# Altium PCB MainBoard.PcbDoc
Units mm, origin at the board's own origin, x right, y up, seen from the top; angles counter-clockwise.
Board outline 99.97 x 100 mm, 2 copper layers (Top Layer, Bottom Layer); 57 components, 54 nets, 235 pads, 18 vias.
Unrouted connection lines stored in the file: 44.
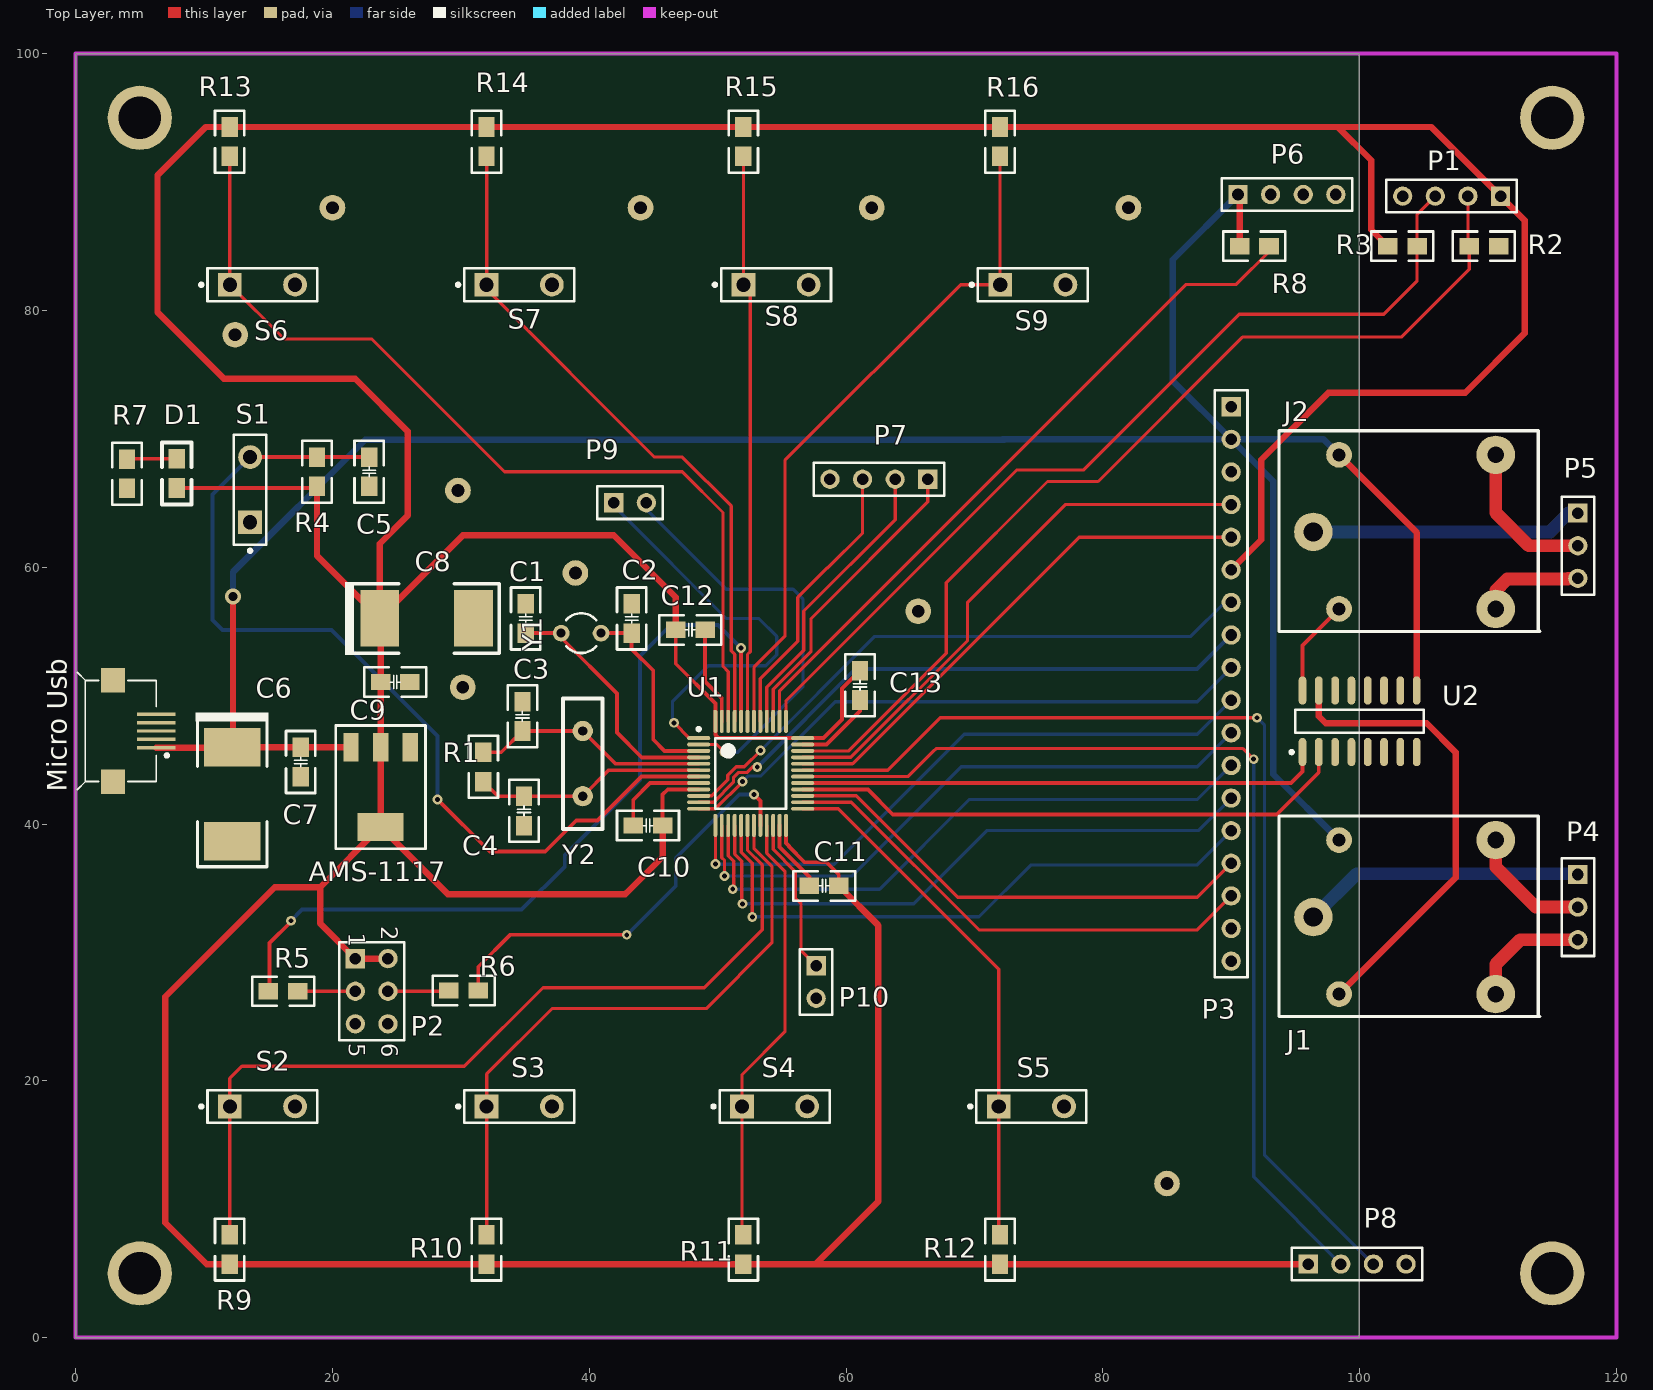
[diagram p0: Top Layer view]
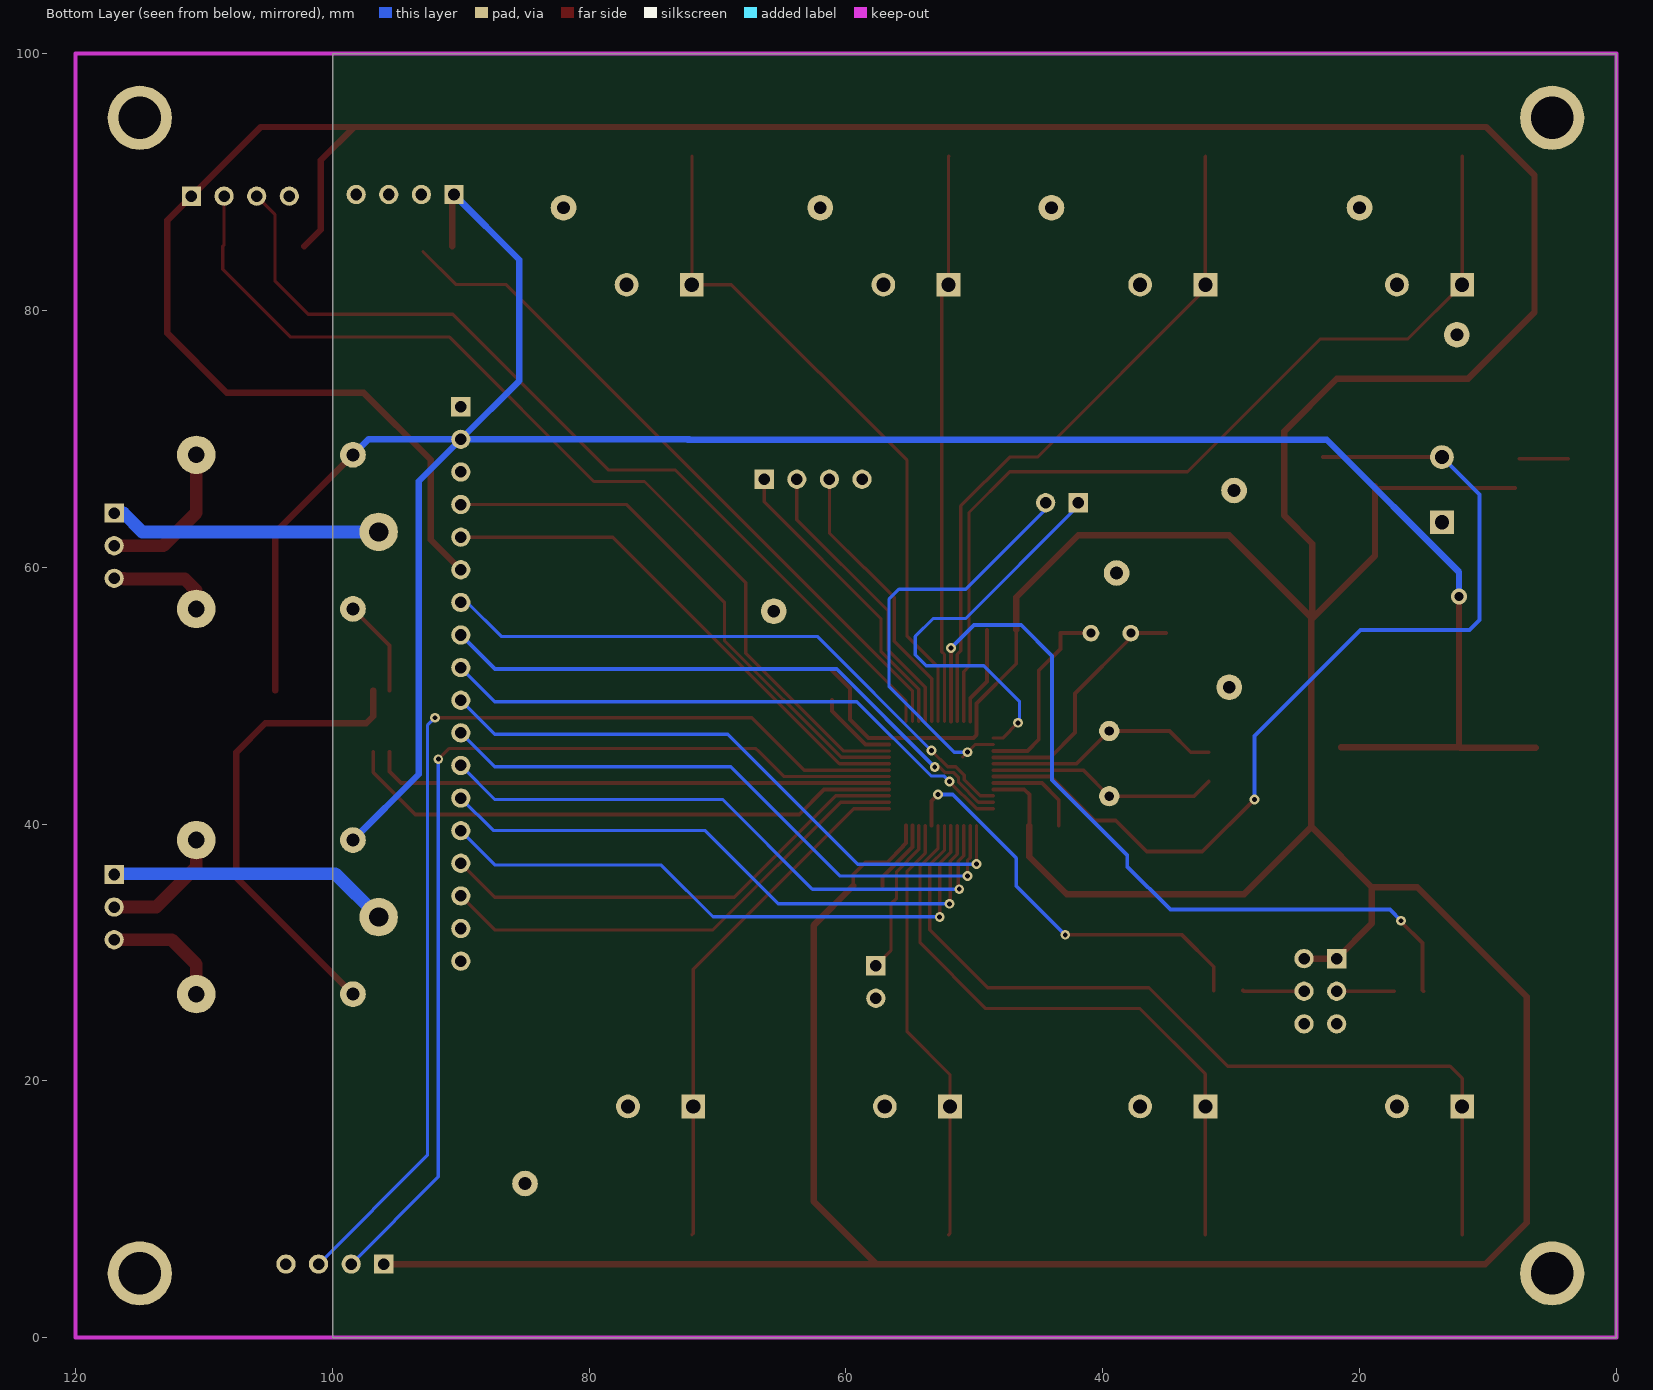
[diagram p1: Bottom Layer view, seen from below]

## Layer stack, top to bottom
Top Layer: signal copper 0.0356
Dielectric: core 0.32, FR-4, Dk 4.8
Bottom Layer: signal copper 0.0356

## Board outline
0,0 0,100 99.95,100 99.975,99.975 99.975,0 0,0

## Design rules (kind name [scope] priority, off if disabled: settings)
Clearance VCC [InNet('VCC3V3') vs Inpolygon] p1: gap=1
Clearance Polygon [inpolygon] p2: gap=0.508
Clearance [All] p3: gap=0.2
PolygonConnect [All] p1: connectstyle=Relief reliefconductorwidth=0.254 reliefentries=4 polygonreliefangle="90 Angle" airgapwidth=0.254
RoutingCorners RoutingCorners_1 [All] p1: cornerstyle=45-Degree minsetback=2.54 maxsetback=2.54
RoutingCorners [All] p2: cornerstyle=45-Degree minsetback=2.54 maxsetback=2.54
RoutingVias [All] p1: holewidth=0.381 width=0.762 viastyle="Through Hole" minholewidth=0.381 minwidth=0.762 maxholewidth=0.711 maxwidth=1.27
SolderMaskExpansion [All] p1: expansion=0.102
Width [All] p1: maxlimit=3 minlimit=0.254 preferedwidth=0.254
27 further rules are at their usual default settings.

## Components (designator, comment, footprint, x,y, rotation, side; value= is the part's Value field where it differs from the comment)
AMS-1117 "AMS-1117" SOT223 26.049,45.974 r180 top
C1 "Cap Semi" 0805C 35.052,57.15 r270 top
C2 "Cap Semi" 0805C 43.307,57.15 r270 top
C3 "Cap Semi" 0805C 34.798,49.53 r270 top
C4 "Cap Semi" 0805C 34.925,39.878 r90 top
C5 "Cap Semi" 0805C 22.86,66.294 r90 top
C6 "Cap Pol3" 7343C 12.192,45.974 r90 top
C7 "Cap Semi" 0805C 17.526,43.688 r90 top
C8 "6.3V,330uF" 7343C 23.688,56.007 r180 top
C9 "Cap Semi" 0805C 26.035,51.054 r180 top
C10 "Cap Semi" 0805C 43.434,39.878 r0 top
C11 "Cap Semi" 0805C 57.15,35.179 r0 top
C12 "Cap Semi" 0805C 49.022,55.118 r180 top
C13 "Cap Semi" 0805C 61.087,49.657 r90 top
D1 "LED1" 0805 7.875,66.167 r90 top
J1 "RWLAY-SPDT" RELAY 95,25 r0 top
J2 "RWLAY-SPDT" RELAY 95,55 r0 top
"Micro Usb" "Micro Usb" MICRO_USB 0.762,47.244 r180 top
P1 "Header 4" HDR1X4 110.978,88.902 r180 top
P2 "Header 3X2" HDR2X3 21.785,29.515 r270 top
P3 "Header 18" HDR1X18 90,72.5 r270 top
P4 "Header 3" HDR1X3 117,36.068 r270 top
P5 "Header 3" HDR1X3 117,64.215 r270 top
P6 "Header 4-DHT11" HDR1X4 90.531,89.029 r0 top
P7 "Header 4 NO USED" HDR1X4 66.37,66.85 r180 top
P8 "Header 4 COMM" HDR1X4 96,5.725 r0 top
P9 "Header 2" HDR1X2 41.91,65.024 r0 top
P10 "Header 2" HDR1X2 57.675,28.965 r270 top
R1 "1M" 0805R 31.75,45.593 r270 top
R2 "Res Semi" 0805R 110.825,85 r180 top
R3 "Res Semi" 0805R 102.189,85 r0 top
R4 "Res Semi" 0805R 18.796,68.58 r270 top
R5 "Res Semi" 0805R 17.3,26.975 r180 top
R6 "Res Semi" 0805R 31.361,27.025 r180 top
R7 "Res Semi" 0805R 4,66.139 r90 top
R8 "Res Semi" 0805R 92.944,85 r180 top
R9 "Res Semi" 0805R 12,8 r270 top
R10 "Res Semi" 0805R 32,8 r270 top
R11 "Res Semi" 0805R 52,8 r270 top
R12 "Res Semi" 0805R 72,8 r270 top
R13 "Res Semi" 0805R 12,92 r90 top
R14 "Res Semi" 0805R 32,92 r90 top
R15 "Res Semi" 0805R 52,92 r90 top
R16 "Res Semi" 0805R 72,92 r90 top
S1 "SW-PB" SPST-2 13.589,66.04 r90 top
S2 "SW-PB" SPST-2 14.55,18 r0 top
S3 "SW-PB" SPST-2 34.55,18 r0 top
S4 "SW-PB" SPST-2 54.44,18 r0 top
S5 "SW-PB" SPST-2 74.44,18 r0 top
S6 "SW-PB" SPST-2 14.55,82 r0 top
S7 "SW-PB" SPST-2 34.55,82 r0 top
S8 "SW-PB" SPST-2 54.55,82 r0 top
S9 "SW-PB" SPST-2 74.55,82 r0 top
U1 "STM32F103C8T6" LQFP48_N 52.578,43.942 r0 top
U2 "ULN2003D" SO16_N 100,48 r90 top
Y1 "32768" R38 39.37,54.864 r90 top
Y2 "8M" XTAL1 39.497,47.244 r270 top

## Footprints (in the part's own frame and the unit in brackets; to place one, negate y for a bottom-side part, rotate by r counter-clockwise, add the part's x,y. Pads: shape width x height; smd on the part's side, far side on the other; paste and mask are expansions set on the pad)
0805 [mil]
  rect 60x50 smd: 1(0,0) 2(90,0)
  silkscreen extent -50,-45 140,45
0805C [mil]
  rect 60x50 smd: 1(0,0) 2(90,0)
  silkscreen extent -50,-45 140,45
0805R [mil]
  rect 60x50 smd: 1(0,0) 2(90,0)
  silkscreen extent -50,-45 140,45
7343C [mm]
  rect 3x4.4 smd: 1(0,0) 2(-7.3,0)
  silkscreen extent -9.31,-2.84 2.7,2.84
HDR1X2 [mm] "Connector; Header; 2 Position"
  rect 1.5x1.5 hole 0.9: 1(0,0)
  round 1.5 hole 0.9: 2(2.54,0)
  silkscreen extent -1.27,-1.27 3.81,1.27
HDR1X3 [mm] "Connector; Header; 3 Position"
  rect 1.5x1.5 hole 0.9: 1(0,0)
  round 1.5 hole 0.9: 2(2.54,0) 3(5.08,0)
  silkscreen extent -1.27,-1.27 6.35,1.27
HDR1X4 [mm] "Connector; Header; 4 Position"
  rect 1.5x1.5 hole 0.9: 1(0,0)
  round 1.5 hole 0.9: 2(2.54,0) 3(5.08,0) 4(7.62,0)
  silkscreen extent -1.27,-1.27 8.89,1.27
HDR1X18 [mm] "Connector; Header; 18 Position"
  rect 1.5x1.5 hole 0.9: 1(0,0)
  round 1.5 hole 0.9: 2(2.54,0) 3(5.08,0) 4(7.62,0) 5(10.16,0) 6(12.7,0) 7(15.24,0) 8(17.78,0) 9(20.32,0) 10(22.86,0) 11(25.4,0) 12(27.94,0) 13(30.48,0) 14(33.02,0) 15(35.56,0) 16(38.1,0) 17(40.64,0) 18(43.18,0)
  silkscreen extent -1.27,-1.27 44.45,1.27
HDR2X3 [mm] "Connector; Header; 3x2 Position"
  rect 1.5x1.5 hole 0.9: 1(0,0)
  round 1.5 hole 0.9: 2(0,2.54) 3(2.54,0) 4(2.54,2.54) 5(5.08,0) 6(5.08,2.54)
  silkscreen extent -1.27,-1.27 6.35,3.81
LQFP48_N [mm] "Thin QFP, 48-Leads, Body 7x7mm, Pitch 0.5mm, IPC Medium Density"
  oval 1.8x0.3 smd: 1(-4.05,2.75) 2(-4.05,2.25) 3(-4.05,1.75) 4(-4.05,1.25) 5(-4.05,0.75) 6(-4.05,0.25) 7(-4.05,-0.25) 8(-4.05,-0.75) 9(-4.05,-1.25) 10(-4.05,-1.75) 11(-4.05,-2.25) 12(-4.05,-2.75) 25(4.05,-2.75) 26(4.05,-2.25) 27(4.05,-1.75) 28(4.05,-1.25) 29(4.05,-0.75) 30(4.05,-0.25) 31(4.05,0.25) 32(4.05,0.75) 33(4.05,1.25) 34(4.05,1.75) 35(4.05,2.25) 36(4.05,2.75)
  oval 0.3x1.8 smd: 13(-2.75,-4.05) 14(-2.25,-4.05) 15(-1.75,-4.05) 16(-1.25,-4.05) 17(-0.75,-4.05) 18(-0.25,-4.05) 19(0.25,-4.05) 20(0.75,-4.05) 21(1.25,-4.05) 22(1.75,-4.05) 23(2.25,-4.05) 24(2.75,-4.05) 37(2.75,4.05) 38(2.25,4.05) 39(1.75,4.05) 40(1.25,4.05) 41(0.75,4.05) 42(0.25,4.05) 43(-0.25,4.05) 44(-0.75,4.05) 45(-1.25,4.05) 46(-1.75,4.05) 47(-2.25,4.05) 48(-2.75,4.05)
  silkscreen extent -4.17,-2.75 2.75,3.57, body extent -3.5,-3.5 3.5,3.5, height 1.6
MICRO_USB [mm]
  rect 3x0.25 smd: 1(-5.508,1.3) 2(-5.508,0.65) 3(-5.508,0) 4(-5.508,-0.65) 5(-5.508,-1.3)
  rect 1.9x1.9 smd: ""(-2.15,3.95) ""(-2.15,-3.95)
  silkscreen extent -6.47,-4.57 0.63,4.57
R38 [mm] "Crystal, Thru-Hole; 2 Leads; Body 3.1 x 8.2 mm (Dia.xH)"
  round 1.3 hole 0.7: 1(0,1.55) 2(0,-1.55)
  silkscreen extent -1.55,-1.19 1.55,1.17
RELAY [mm]
  round 3 hole 1.5: 1(1.4,7.75)
  round 3 hole 1.3: 2(15.6,13.75) 3(15.6,1.75)
  round 2 hole 1: 4(3.4,13.75) 5(3.4,1.75)
  silkscreen extent -1.27,0 19.05,15.62
SO16_N [mm] "SOIC, 16-Leads, Body 9.9x3.9mm, Pitch 1.27mm, IPC Medium Density"
  oval 2.2x0.6 smd: 1(-2.4,4.445) 2(-2.4,3.175) 3(-2.4,1.905) 4(-2.4,0.635) 5(-2.4,-0.635) 6(-2.4,-1.905) 7(-2.4,-3.175) 8(-2.4,-4.445) 9(2.4,-4.445) 10(2.4,-3.175) 11(2.4,-1.905) 12(2.4,-0.635) 13(2.4,0.635) 14(2.4,1.905) 15(2.4,3.175) 16(2.4,4.445)
  silkscreen extent -2.52,-5 0.9,5.42, body extent -1.95,-4.95 1.95,4.95, height 1.75
SOT223 [mm]
  rect 1.2x2.2 smd: 1(0,0) 2(2.3,0) 3(4.6,0)
  rect 3.6x2.2 smd: 4(2.3,6.2)
  silkscreen extent -1.2,-1.7 5.8,7.9
SPST-2 [mm] "Switch; 2 Leads"
  rect 1.85x1.85 hole 1.1: 1(-2.54,0)
  round 1.85 hole 1.1: 2(2.54,0)
  silkscreen extent -4.89,-1.27 4.28,1.27
XTAL1 [mil]
  round 62 hole 28: 1(0,0) 2(200,0)
  silkscreen extent -100,-60 300,60

## Part data
C1 C2 C3 C4 C5 C7 C9 C10 C11 C12 C13: "Capacitor (Semiconductor SIM Model)"
C6: "Polarized Capacitor (Surface Mount)"
C8: library part "Cap Pol3", "Polarized Capacitor (Surface Mount)"
D1: "Typical RED GaAs LED"
P1: "Header, 4-Pin"
P2: "Header, 3-Pin, Dual row"
P3: "Header, 18-Pin"
P4 P5: "Header, 3-Pin"
P6 P7 P8: library part "Header 4", "Header, 4-Pin"
P9 P10: "Header, 2-Pin"
R1: library part "Res Semi", "Semiconductor Resistor"
R2 R3 R4 R5 R6 R7 R8 R9 R10 R11 R12 R13 R14 R15 R16: "Semiconductor Resistor"
S1 S2 S3 S4 S5 S6 S7 S8 S9: "Switch"
U1: "STM32 ARM-based 32-bit MCU Performance Line with 64 kB Flash, 20 kB Internal RAM, -40 to +85癈 Temperature, 48-Pin LQFP, Tray"
U2: "Seven Darlington Array"
Y1 Y2: library part XTAL, "Crystal Oscillator"

## Free pads (board coordinates)
  round 5 hole 3.3: 0(5,95) 1(5,5) 2(115,5) 3(115,95)
  round 2 hole 1: 7(85,12) 8(20,88) 9(44,88) 10(62,88) 11(82,88) 12(65.625,56.575) 13(65.625,56.575) 14(29.775,65.975) 15(29.775,65.975) 16(30.15,50.65) 17(30.15,50.65) 18(38.925,59.55) 19(38.925,59.55) 20(12.425,78.1)

## Via types
v1: diameter 0.762, hole 0.381, Top Layer to Bottom Layer, 17 vias
v2: diameter 1.27, hole 0.711, Top Layer to Bottom Layer, 1 vias

## Nets (pads, with @x,y where several pads share a name; then routed paths per layer and width w, separated by ;. In a path a pad name is that pad's centre, name@x,y a point inside that pad or via, vN(x,y) a via of type N, cw(c..) or ccw(c..) an arc to the next point about the centre after c; other vN are vias at no path point)
+5: "Micro Usb.1" AMS-1117.3 C6.1 C7.2 J1.4 J2.4 P3.2 P6.1 R8.2 U2.9 | length 202.6
  Top Layer w0.5: 6.27,45.944 12.162,45.944 C6.1 ; v2(12.255,57.721) 12.255,46.038 C6.1 ; AMS-1117.3 C7.2 C6.1 ; P6.1 90.658,88.902 R8.2 ; J2.4 104.445,62.705 U2.9
  Bottom Layer w0.5: v2(12.255,57.721) 12.255,59.627 22.554,69.925 72.325,69.925 ; 72.22,69.96 P3.2 ; P6.1 85.45,83.948 85.45,74.51 P3.2 ; J1.4 93.275,43.875 93.275,66.685 P3.2 ; J2.4 97.19,69.96 P3.2
BAT: P9.1 U1.1 | length 31.7
  Top Layer w0.254: v1(46.609,47.879) 47.796,46.692 U1.1
  Bottom Layer w0.254: P9.1@42.291,64.516 42.291,64.389 50.673,56.007 53.213,56.007 54.61,54.61 54.61,53.174 53.76,52.324 49.276,52.324 46.482,49.53 46.482,48.006 v1(46.609,47.879)
BOOT0: R5.2 U1.44 | length 63.5
  Top Layer w0.3: R5.2 15.1,27.061 15.1,30.721 16.764,32.385 v1(16.764,32.464) ; U1.44 v1(51.828,53.709)
  Bottom Layer w0.3: v1(16.764,32.464) 17.637,33.337 34.734,33.337 38.1,36.703 38.1,37.592 43.942,43.434 43.942,53.086 46.355,55.499 50.038,55.499 v1(51.828,53.709)
BOOT1: R6.1 U1.20 | length 32.8
  Top Layer w0.3: R6.1 31.361,28.886 33.844,31.369 v1(42.926,31.369) ; v1(52.832,42.291) 53.328,41.795 U1.20
  Bottom Layer w0.3: v1(42.926,31.369) 46.736,35.179 46.736,37.338 51.689,42.291 v1(52.832,42.291)
GND: "Micro Usb.4" "Micro Usb.5" AMS-1117.1 C1.1 C2.1 C3.1 C4.1 C5.1 C6.2 C7.1 C8.2 C9.1 C10.1 C11.1 C12.1 C13.1 P1.4 P2.5 P2.6 P3.1 P6.4 P8.4 pad.7 pad.8 pad.9 pad.10 pad.11 pad.12 pad.13 pad.14 pad.15 pad.16 pad.17 pad.18 pad.19 pad.20 R2.1 R7.1 S1.1 S2.2 S3.2 S4.2 S5.2 S6.2 S7.2 S8.2 S9.2 U1.8 U1.23 U1.35 U1.47 U2.8 | length 27.4
  Top Layer w0.3: C10.1 43.434,41.879 44.747,43.192 U1.8 ; C12.1 49.022,51.085 50.328,49.779 U1.47 ; U1.23 54.828,38.197 57.15,35.875 C11.1 ; U1.35 58.48,46.192 61.087,48.799 C13.1
NetD1_2: D1.2 R7.2 | length 3.8
  Top Layer w0.3: R7.2@3.75,68.45 D1.2@7.56,68.45
NetJ1_1: J1.1 P4.1 | length 22
  Bottom Layer w1: J1.1 99.775,36.125 116.943,36.125 P4.1
NetJ1_2: J1.2 P4.2 | length 9.8
  Top Layer w1: J1.2 110.6,36.65 113.722,33.528 P4.2
NetJ1_3: J1.3 P4.3 | length 9.5
  Top Layer w1: J1.3 110.6,29.075 112.513,30.988 P4.3
NetJ2_1: J2.1 P5.1 | length 20.5
  Bottom Layer w1: J2.1 114.81,62.75 P5.1@116.275,64.215
NetJ2_2: J2.2 P5.2 | length 9.8
  Top Layer w1: J2.2@110.6,67.35 110.6,64.25 113.175,61.675 P5.2@116.275,61.675
NetJ2_3: J2.3 P5.3 | length 7.5
  Top Layer w1: J2.3 110.6,58.175 111.5,59.075 116.215,59.075 P5.3@116.275,59.135
NetP2_3: P2.3 R5.1 | length 4.5
  Top Layer w0.3: R5.1 P2.3
NetP2_4: P2.4 R6.2 | length 4.8
  Top Layer w0.3: P2.4 29.025,26.975 R6.2
NetP7_1: P7.1 U1.39 | length 23.8
  Top Layer w0.254: U1.39 54.328,50.511 57.277,53.46 57.277,56.007 66.37,65.1 P7.1
NetP7_2: P7.2 U1.40 | length 23
  Top Layer w0.254: U1.40 53.828,50.653 56.715,53.54 56.715,56.588 63.83,63.703 P7.2
NetP7_3: P7.3 U1.41 | length 22.2
  Top Layer w0.254: U1.41 53.328,51.308 56.249,54.229 56.249,57.646 58.547,59.944 58.569,59.944 61.29,62.665 P7.3
NetP9_2: P9.2 U1.2 | length 33.5
  Top Layer w0.254: U1.2 49.947,46.192 50.927,45.212
  Bottom Layer w0.254: P9.2@44.069,64.897 50.673,58.293 50.927,58.293 55.88,58.293 56.642,57.531 56.642,50.673 51.562,45.593 v1(50.546,45.593)
OSC_IN: C3.2 R1.1 U1.5 Y2.1 | length 18.5
  Top Layer w0.3: R1.1 33.147,45.593 C3.2 Y2.1 42.049,44.692 U1.5
OSC_OUT: C4.2 R1.2 U1.6 Y2.2 | length 18.1
  Top Layer w0.3: R1.2 32.893,42.164 C4.2 Y2.2 41.525,44.192 U1.6
OUT1: J2.5 U2.16 | length 7.5
  Top Layer w0.3: U2.16 95.555,53.905 J2.5
OUT2: J1.5 U2.15 | length 36.4
  Top Layer w0.5: U2.15 96.825,48.4 97.375,47.85 105.225,47.85 107.475,45.6 107.475,35.825 J1.5
PA0: P3.7 U1.10 | length 47.9
  Top Layer w0.254: U1.10 49.544,42.192 50.781,43.429 50.781,43.788 51.462,44.469 52.089,44.469 v1(53.34,45.72)
  Bottom Layer w0.254: v1(53.34,45.72) 62.23,54.61 86.868,54.61 89.518,57.26 P3.7
PA1: P3.8 U1.11 | length 47.1
  Top Layer w0.254: U1.11 49.686,41.692 51.235,43.241 51.235,43.6 51.65,44.015 52.31,44.015 v1@52.745,44.45
  Top Layer w0.3: v1@52.745,44.45 v1(53.086,44.45)
  Bottom Layer w0.3: v1(53.086,44.45) 53.104,44.45 60.724,52.07 87.35,52.07 P3.8
PA2: P3.9 U1.12 | length 46
  Top Layer w0.254: U1.12 49.828,41.192 v1(51.943,43.307)
  Bottom Layer w0.254: v1(51.943,43.307) 52.378,43.742 53.379,43.742 59.167,49.53 87.35,49.53 P3.9
PA3: P3.10 U1.13 | length 48.5
  Top Layer w0.254: v1(49.828,36.874) U1.13
  Bottom Layer w0.254: v1(49.828,36.874) 59.099,36.874 69.215,46.99 87.35,46.99 P3.10
PA4: P3.11 U1.14 | length 48.1
  Top Layer w0.254: U1.14 50.328,37.375 50.536,37.167 50.536,35.951 v1(50.546,35.941)
  Bottom Layer w0.254: v1(50.546,35.941) 60.452,35.941 68.961,44.45 87.35,44.45 P3.11
PA5: P3.12 U1.15 | length 48
  Top Layer w0.254: U1.15 50.828,37.517 51.254,37.091 51.254,34.998 v1(51.181,34.925)
  Bottom Layer w0.254: v1(51.181,34.925) 62.611,34.925 69.596,41.91 87.35,41.91 P3.12
PA6: P3.13 U1.16 | length 47.9
  Top Layer w0.254: U1.16 51.328,37.659 51.889,37.098 51.889,33.728 v1(51.943,33.782)
  Bottom Layer w0.254: v1(51.943,33.782) 65.278,33.782 70.993,39.497 87.477,39.497 P3.13
PA7: P3.14 U1.17 | length 47.6
  Top Layer w0.254: U1.17 51.851,39.869 51.851,37.79 52.705,36.936 v1(52.705,32.766)
  Bottom Layer w0.254: v1(52.705,32.766) 70.358,32.766 74.396,36.804 87.324,36.804 P3.14
PA8: U1.29 U2.1 | length 40.8
  Top Layer w0.3: U1.29 94.667,43.192 95.555,44.08 U2.1
PA9: P8.2 U1.30 | length 78.5
  Top Layer w0.254: U1.30 64.825,43.692 66.825,45.692 66.842,45.692 67.025,45.875 90.925,45.875 v1(91.75,45.05)
  Bottom Layer w0.254: v1(91.75,45.05) 91.75,12.515 P8.2
PA10: P8.3 U1.31 | length 83.4
  Top Layer w0.254: U1.31 63.267,44.192 67.35,48.275 v1(92,48.275)
  Bottom Layer w0.254: v1(92,48.275) 92.6,47.675 92.6,14.205 P8.3
PA11: P3.5 U1.32 | length 40.7
  Top Layer w0.254: U1.32 60.51,44.692 78.158,62.34 P3.5
PA12: P3.4 U1.33 | length 43.3
  Top Layer w0.254: U1.33 60.368,45.192 69.469,54.293 69.469,57.277 77.072,64.88 P3.4
PA15: P6.2 R8.1 U1.38 | length 54.7
  Top Layer w0.254: U1.38 54.828,50.369 86.484,82.025 90.385,82.025 R8.1@92.944,84.584
PB0: R9.1 S2.1 U1.18 | length 67.1
  Top Layer w0.254: R9.1 12.01,8.01 S2.1 12.01,20.185 12.95,21.125 30.275,21.125 36.4,27.25 48.967,27.25 53.467,31.75 53.467,36.816 52.328,37.955 U1.18
PB1: R10.1 S3.1 U1.19 | length 48.7
  Top Layer w0.254: R10.1 32.01,8.01 S3.1 32.01,20.535 37.1,25.625 49.12,25.625 54.229,30.734 54.229,36.696 52.828,38.097 U1.19
PB6: R16.1 S9.1 U1.42 | length 53.8
  Top Layer w0.254: U1.42 52.828,52.193 55.245,54.61 55.245,68.32 68.925,82 S9.1 72,82.01 R16.1
PB7: R15.1 S8.1 U1.43 | length 44.3
  Top Layer w0.254: R15.1 52.01,91.99 S8.1 52.536,81.474 52.536,53.416 52.328,53.208 U1.43
PB8: R14.1 S7.1 U1.45 | length 53.3
  Top Layer w0.254: R14.1 32.01,91.99 S7.1 32.01,81.655 45.085,68.58 47.244,68.58 51.054,64.77 51.054,53.482 51.328,53.208 U1.45
PB9: R13.1 S6.1 U1.46 | length 72.2
  Top Layer w0.254: R13.1 12.01,91.99 S6.1 16.235,77.775 23.063,77.775 33.401,67.437 47.244,67.437 50.419,64.262 50.419,52.271 50.828,51.862 U1.46
PB10: R11.1 S4.1 U1.21 | length 33.9
  Top Layer w0.254: R11.1 51.9,8.1 S4.1 51.9,20.475 55.245,23.82 55.245,36.322 53.828,37.739 U1.21
PB11: P10.1 U1.22 | length 12.3
  Top Layer w0.254: U1.22 54.328,38.022 56.061,36.289 56.061,34.217 56.5,33.778 56.5,30.14 P10.1
PB12: R12.1 S5.1 U1.25 | length 41.2
  Top Layer w0.254: U1.25 59.392,41.192 71.9,28.684 S5.1 71.9,8.1 R12.1
PB13: P3.16 U1.26 | length 38.6
  Top Layer w0.254: U1.26 60.416,41.692 70.358,31.75 87.35,31.75 P3.16
PB14: P3.15 U1.27 | length 37.7
  Top Layer w0.254: U1.27 60.805,42.192 68.707,34.29 87.35,34.29 P3.15
PB15: U1.28 U2.2 | length 43.9
  Top Layer w0.3: U1.28 61.7,42.692 63.642,40.75 93.55,40.75 96.825,44.025 U2.2
PC14: C2.2 U1.3 Y1.2 | length 15.3
  Top Layer w0.3: Y1.2 C2.2 43.307,53.62 44.984,51.943 44.984,46.583 45.875,45.692 U1.3
PC15: C1.2 U1.4 Y1.1 | length 19.5
  Top Layer w0.3: C1.2 Y1.1 37.82,54.509 42.164,50.165 42.164,47.117 44.089,45.192 U1.4
RESET: C5.2 R4.1 S1.2 U1.7 | length 73.8
  Top Layer w0.3: S1.2 R4.1 C5.2 ; v1(28.194,41.91) 32.258,37.846 36.576,37.846 38.989,40.259 40.636,40.259 44.069,43.692 U1.7
  Bottom Layer w0.3: S1.2 10.668,65.659 10.668,55.88 11.43,55.118 19.939,55.118 28.194,46.863 v1(28.194,41.91)
SWCLK: P1.3 R3.2 U1.37 | length 71.5
  Top Layer w0.254: U1.37 55.328,49.613 73.279,67.564 78.486,67.564 90.622,79.7 101.875,79.7 104.475,82.3 R3.2 104.475,87.479 P1.3
SWDIO: P1.2 R2.2 U1.34 | length 76.4
  Top Layer w0.254: U1.34 60.226,45.692 67.818,53.284 67.818,58.801 75.692,66.675 79.629,66.675 90.879,77.925 103.25,77.925 108.539,83.214 R2.2 108.438,85.101 P1.2
VCC3V3: AMS-1117.2 AMS-1117.4 C8.1 C9.2 C10.2 C11.2 C12.2 C13.2 D1.1 P1.1 P2.1 P2.2 P3.6 P8.1 R3.1 R4.2 R9.2 R10.2 R11.2 R12.2 R13.2 R14.2 R15.2 R16.2 U1.9 U1.24 U1.36 U1.48 | length 521.5
  Top Layer w0.3: D1.1 18.669,66.167 R4.2 ; C8.1 C8.1@23.749,55.946 ; 42.799,34.671 42.871,34.599 ; C10.2 45.72,42.291 46.121,42.692 U1.9 ; C12.2 46.736,52.476 49.828,49.384 U1.48 49.828,46.946 50.082,46.692 U1.36 58.249,46.692 59.69,48.133 59.69,50.546 C13.2 ; U1.24 55.328,38.507 55.559,38.276 55.559,38.235 56.769,37.025 58.479,37.025 59.436,36.068 C11.2
  Top Layer w0.5: R4.2 18.796,60.899 C8.1 ; C8.1@23.749,55.946 C9.2 AMS-1117.2 AMS-1117.4 ; P2.2 P2.1 19.05,32.25 19.05,35.075 ; C10.2 45.72,37.447 42.799,34.526 28.997,34.526 AMS-1117.4 ; C12.2 46.736,57.658 41.91,62.484 30.165,62.484 C8.1 ; C11.2 62.525,32.09 62.525,10.614 57.625,5.714 ; P3.6 92.35,62.15 92.35,68.375 97.575,73.6 108.225,73.6 112.85,78.225 112.85,87.03 P1.1 105.594,94.286 98.3,94.286 ; P8.1 95.989,5.714 R12.2 57.625,5.714 ; R3.1 100.9,86.289 100.9,91.686 98.3,94.286 ; 19.05,35.075 15.517,35.075 6.985,26.543 6.985,8.94 10.211,5.714 R9.2 R10.2 R11.2 57.625,5.714 ; 19.05,35.075 AMS-1117.4 ; C8.1 23.688,61.838 25.875,64.025 25.875,70.575 21.775,74.675 11.55,74.675 6.375,79.85 6.375,90.525 10.136,94.286 R13.2 R14.2 R15.2 R16.2 98.3,94.286
pads on no net: "Micro Usb.2" "Micro Usb.3" "Micro Usb." P3.3 P3.17 P3.18 P6.3 P7.4 P10.2 U2.3 U2.4 U2.5 U2.6 U2.7 U2.10 U2.11 U2.12 U2.13 U2.14

## Keep-outs
Keep-Out Layer:
  lines w0.3: 0,0 0,100 120,100 120,0 0,0

## Dimensions
0,0 to 0,100 on Mechanical 1

## Text inside footprints (layer, text, board x,y; h text height)
P2: Top Overlay "1" at 21.277,31.547 h1.27 r270; Top Overlay "2" at 23.817,32.055 h1.27 r270; Top Overlay "5" at 21.277,22.911 h1.27 r270; Top Overlay "6" at 23.817,22.911 h1.27 r270